# Altium PCB DTMF.PcbDoc
Units mm, origin at the board's own origin, x right, y up, seen from the top; angles counter-clockwise.
Board outline 116.33 x 73.28 mm, 2 copper layers (Top Layer, Bottom Layer); 55 components, 51 nets, 222 pads, 12 vias.
Unrouted connection lines stored in the file: 1.
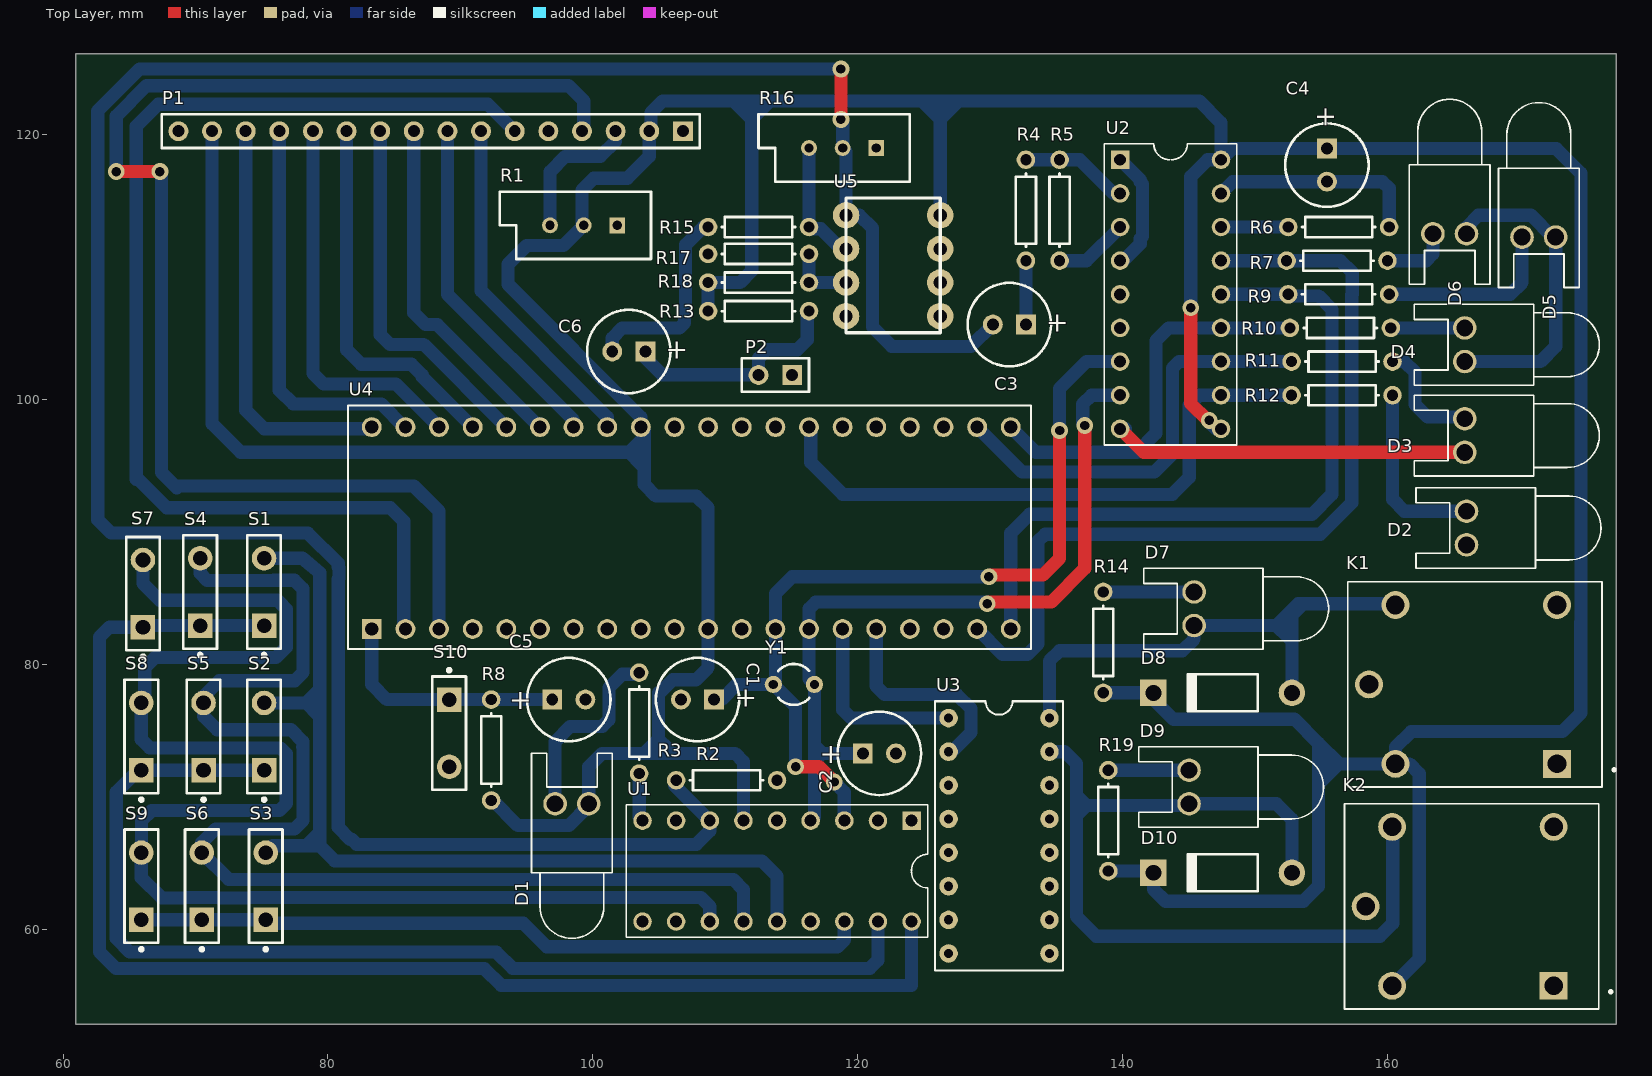
[diagram p0: Top Layer view]
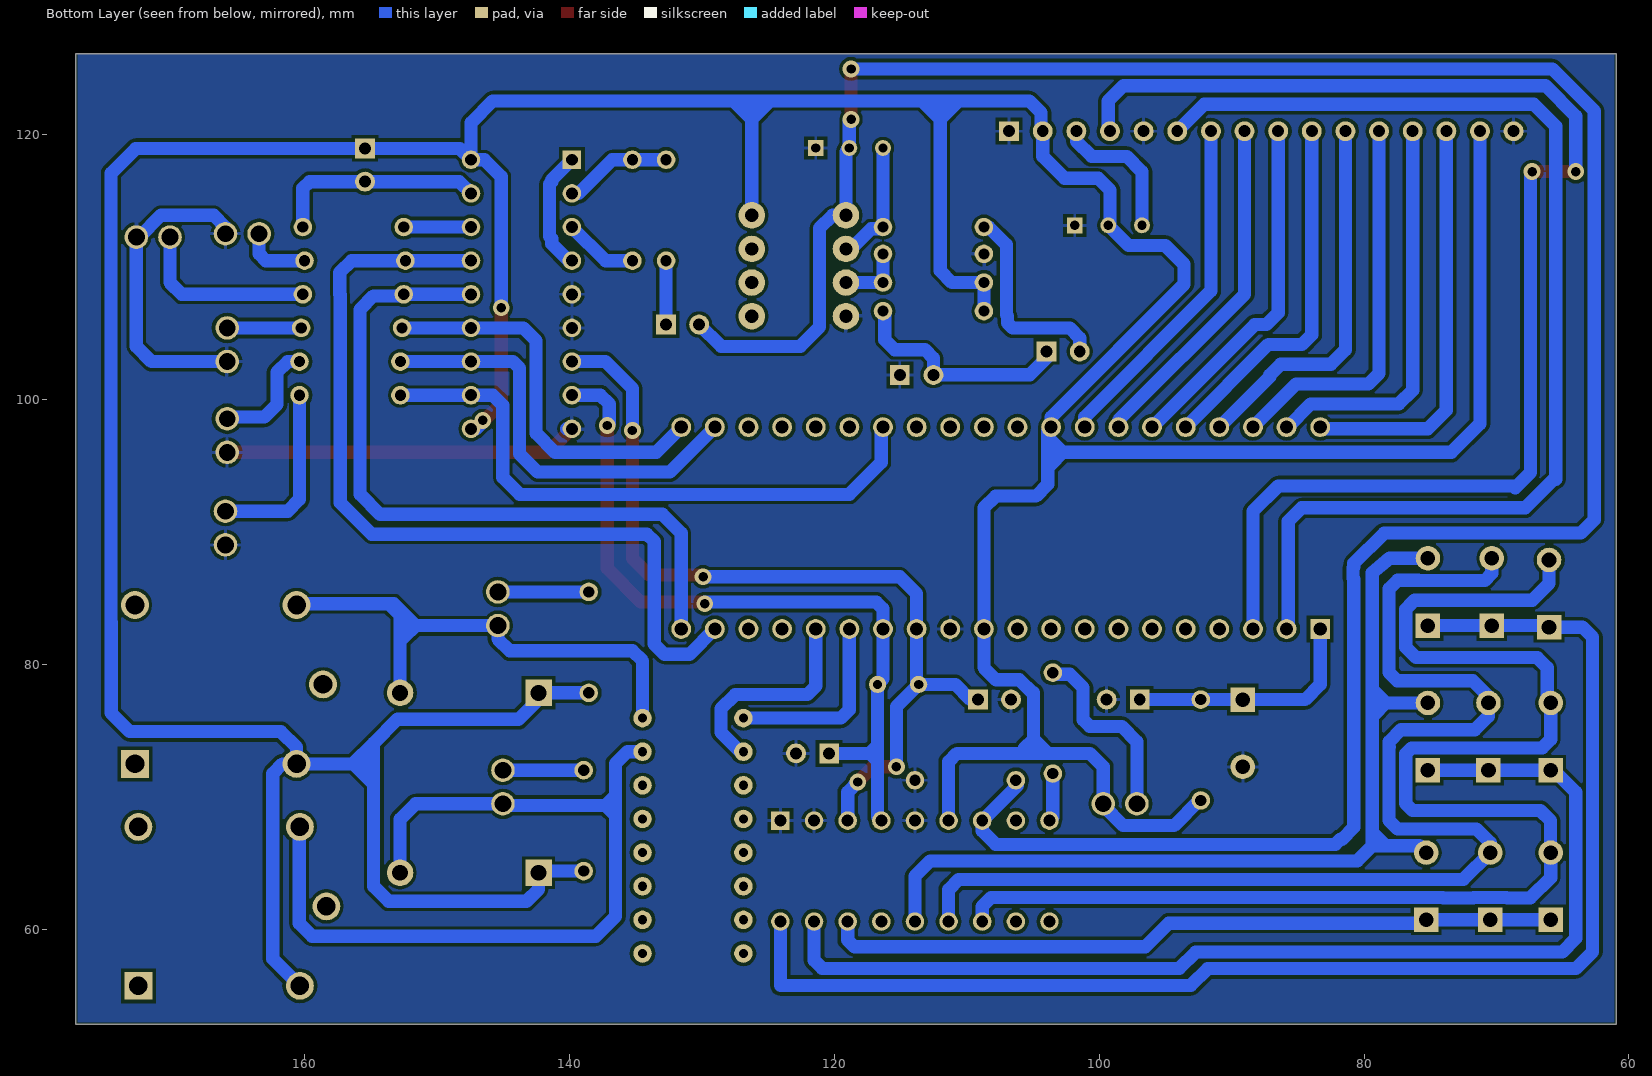
[diagram p1: Bottom Layer view, seen from below]

## Layer stack, top to bottom
Top Solder: solder mask 0.0102, Solder Resist, Dk 3.5
Top Layer: signal copper 0.0356
Dielectric 1: dielectric 0.32, FR-4, Dk 4.8
Bottom Layer: signal copper 0.0356
Bottom Solder: solder mask 0.0102, Solder Resist, Dk 3.5

## Board outline
177.292,126.111 177.292,52.832 60.96,52.832 60.96,126.111

## Design rules (kind name [scope] priority, off if disabled: settings)
Clearance Clearance_1 [All] p1: gap=0.254 ignorepadtopadclearanceinfootprint=FALSE except(0: Arc-Hole Track-Hole SMDPad-Hole THPad-Hole Via-Hole Fill-Hole Poly-Hole Region-Hole Text-Hole)
Clearance [All] p2: gap=0.5 ignorepadtopadclearanceinfootprint=FALSE
PolygonConnect [All] p1: connectstyle=Relief reliefconductorwidth=0.254 reliefentries=4 polygonreliefangle="90 Angle" airgapwidth=0.254
RoutingVias [All] p1: holewidth=0.711 width=1.27 viastyle="Through Hole" minholewidth=0.711 minwidth=1.27 maxholewidth=0.711 maxwidth=1.27
SolderMaskExpansion [All] p1: expansion=0.102
Width [All] p1: maxlimit=2 minlimit=0.5 preferedwidth=1
30 further rules are at their usual default settings.

## Components (designator, comment, footprint, x,y, rotation, side; value= is the part's Value field where it differs from the comment)
C1 "cap" capacitor 109.18,77.343 r180 top value=22pF
C2 "cap" capacitor 120.376,73.279 r0 top value=22pF
C3 "cap" capacitor 132.735,105.664 r180 top value=0.1uF
C4 "cap" capacitor 155.448,118.979 r270 top value=0.1uF
C5 "cap" capacitor 96.921,77.343 r0 top value=0.1uF
C6 "cap" capacitor 103.993,103.632 r180 top value=0.1uF
D1 "LED0" LED-0 98.425,69.469 r0 top
D2 "LED0" LED-0 165.989,90.297 r90 top
D3 "LED0" LED-0 165.862,97.282 r90 top
D4 "LED0" LED-0 165.862,104.14 r90 top
D5 "LED0" LED-0 171.45,112.268 r180 top
D6 "LED0" LED-0 164.719,112.522 r180 top
D7 "LED0" LED-0 145.415,84.201 r90 top
D8 "Diode 1N4007" DO-41 147.574,77.851 r180 top
D9 "LED0" LED-0 145.034,70.739 r90 top
D10 "Diode 1N4007" DO-41 147.574,64.262 r180 top
K1 "1-1721150-0" RELAY_ORWH-SH-105D1F,000 166.624,78.486 r180 top
K2 "1-1721150-0" RELAY_ORWH-SH-105D1F,000 166.37,61.722 r180 top
P1 "Header 16" HDR1X16 106.807,120.269 r180 top
P2 "Header 2" HDR1X2 115.062,101.854 r180 top
R1 "RPot" VR5 99.314,113.157 r180 top value=10K
R2 "Res1" AXIAL-0.3 110.109,71.247 r180 top value=2.2K
R3 "Res1" AXIAL-0.3 103.505,75.565 r90 top value=1K
R4 "Res1" AXIAL-0.3 132.715,114.3 r90 top value=100K
R5 "Res1" AXIAL-0.3 135.255,114.3 r90 top value=100K
R6 "Res1" AXIAL-0.3 156.337,113.03 r0 top value=330
R7 "Res1" AXIAL-0.3 156.21,110.49 r0 top value=4.7K
R8 "Res1" AXIAL-0.3 92.329,73.533 r270 top value=10K
R9 "Res1" AXIAL-0.3 156.337,107.95 r0 top value=4.7K
R10 "Res1" AXIAL-0.3 156.464,105.41 r0 top value=4.7K
R11 "Res1" AXIAL-0.3 156.591,102.87 r0 top value=4.7K
R12 "Res1" AXIAL-0.3 156.591,100.33 r0 top value=4.7K
R13 "Res1" AXIAL-0.3 112.522,106.68 r0 top value=10K
R14 "Res1" AXIAL-0.3 138.557,81.661 r90 top value=1K
R15 "Res1" AXIAL-0.3 112.522,113.03 r180 top value=1K
R16 "RPot" VR5 118.872,118.999 r180 top value=1M
R17 "Res1" AXIAL-0.3 112.522,110.998 r0 top value=10K
R18 "Res1" AXIAL-0.3 112.522,108.839 r0 top value=10K
R19 "Res1" AXIAL-0.3 138.938,68.199 r90 top value=1K
S1 "SW-PB" SPST-2 75.176,85.471 r90 top
S2 "SW-PB" SPST-2 75.176,74.549 r90 top
S3 "SW-PB" SPST-2 75.303,63.246 r90 top
S4 "SW-PB" SPST-2 70.35,85.471 r90 top
S5 "SW-PB" SPST-2 70.604,74.549 r90 top
S6 "SW-PB" SPST-2 70.477,63.246 r90 top
S7 "SW-PB" SPST-2 66.032,85.344 r90 top
S8 "SW-PB" SPST-2 65.905,74.549 r90 top
S9 "SW-PB" SPST-2 65.905,63.246 r90 top
S10 "SW-PB" SPST-2 89.154,74.803 r270 top
U1 "91215" HT9170 113.919,64.389 r180 top
U2 "HT9170" HT9170 143.637,107.95 r270 top
U3 "ULN2004A" ULN2004A 130.683,67.056 r270 top
U4 "PIC16F887A" PIC16F887A 131.572,97.917 r90 top
U5 "LM358" LM358 126.238,115.219 r270 top
Y1 "XTAL" R38 115.189,78.486 r270 top

## Footprints (in the part's own frame and the unit in brackets; to place one, negate y for a bottom-side part, rotate by r counter-clockwise, add the part's x,y. Pads: shape width x height; smd on the part's side, far side on the other; paste and mask are expansions set on the pad)
AXIAL-0.3 [mm] "Axial Device, Thru-Hole; 2 Leads; 0.3 in Pin Spacing"
  round 1.4 hole 0.85: 1(-3.81,0) 2(3.81,0)
  silkscreen extent -2.77,-0.76 2.77,0.76
capacitor [mm]
  rect 1.5x1.5 hole 0.9: 1(0.02,0)
  round 1.5 hole 0.9: 2(2.52,0)
  silkscreen extent -1.88,-3.15 4.42,3.15
DO-41 [mm] "Diode, Axial; Body 5.2 x 2.7 mm (LxDia. max), Lead Dia. 0.86 mm (max)"
  round 2 hole 1.2: 1(-5.23,0)
  rect 2x2 hole 1.2: 2(5.23,0)
  silkscreen extent -2.65,-1.4 2.75,1.4
HDR1X2 [mm] "Connector; Header; 2 Position"
  rect 1.5x1.5 hole 0.9: 1(0,0)
  round 1.5 hole 0.9: 2(2.54,0)
  silkscreen extent -1.27,-1.27 3.81,1.27
HDR1X16 [mm] "Connector; Header; 16 Position"
  rect 1.5x1.5 hole 0.9: 1(0,0)
  round 1.5 hole 0.9: 2(2.54,0) 3(5.08,0) 4(7.62,0) 5(10.16,0) 6(12.7,0) 7(15.24,0) 8(17.78,0) 9(20.32,0) 10(22.86,0) 11(25.4,0) 12(27.94,0) 13(30.48,0) 14(33.02,0) 15(35.56,0) 16(38.1,0)
  silkscreen extent -1.27,-1.27 39.37,1.27
HT9170 [mm]
  rect 1.4x1.4 hole 0.9: 1(-10.16,-3.81)
  round 1.4 hole 0.9: 2(-7.62,-3.81) 3(-5.08,-3.81) 4(-2.54,-3.81) 5(0,-3.81) 6(2.54,-3.81) 7(5.08,-3.81) 8(7.62,-3.81) 9(10.16,-3.81) 10(10.16,3.81) 11(7.62,3.81) 12(5.08,3.81) 13(2.54,3.81) 14(0,3.81) 15(-2.54,3.81) 16(-5.08,3.81) 17(-7.62,3.81) 18(-10.16,3.81)
  silkscreen extent -11.38,-5 11.38,5
LED-0 [mil] "LED; 2 Leads"
  round 70 hole 50: 1(50,0) 2(-50,0)
  silkscreen extent -120,-400 120,150
LM358 [mm] "LM358"
  round 2 hole 1: 1(1.3,-7.11) 2(3.84,-7.11) 3(6.38,-7.11) 4(8.92,-7.11) 5(8.92,0) 6(6.38,0) 7(3.84,0) 8(1.3,0)
  silkscreen extent 0,-7.11 10.16,0
PIC16F887A [mil]
  rect 59x59 hole 39: 1(-600,1900)
  round 59 hole 39: 2(-600,1800) 3(-600,1700) 4(-600,1600) 5(-600,1500) 6(-600,1400) 7(-600,1300) 8(-600,1200) 9(-600,1100) 10(-600,1000) 11(-600,900) 12(-600,800) 13(-600,700) 14(-600,600) 15(-600,500) 16(-600,400) 17(-600,300) 18(-600,200) 19(-600,100) 20(-600,0) 21(0,0) 22(0,100) 23(0,200) 24(0,300) 25(0,400) 26(0,500) 27(0,600) 28(0,700) 29(0,800) 30(0,900) 31(0,1000) 32(0,1100) 33(0,1200) 34(0,1300) 35(0,1400) 36(0,1500) 37(0,1600) 38(0,1700) 39(0,1800) 40(0,1900)
  silkscreen extent -660,-60 65,1971
R38 [mm] "Crystal, Thru-Hole; 2 Leads; Body 3.1 x 8.2 mm (Dia.xH)"
  round 1.3 hole 0.7: 1(0,1.55) 2(0,-1.55)
  silkscreen extent -1.55,-1.19 1.55,1.17
RELAY_ORWH-SH-105D1F,000 [mm]
  rect 2.1x2.1 hole 1.4: 1(-6.2,6)
  round 2.1 hole 1.4: 2(-6.2,-6) 3(6,6) 4(8,0) 5(6,-6)
  silkscreen extent -10.61,-7.75 9.6,7.75
SPST-2 [mm] "Switch; 2 Leads"
  rect 1.85x1.85 hole 1.1: 1(-2.54,0)
  round 1.85 hole 1.1: 2(2.54,0)
  silkscreen extent -4.89,-1.27 4.28,1.27
ULN2004A [mm]
  round 1.4 hole 0.7: 1(-8.89,-3.81) 2(-6.35,-3.81) 3(-3.81,-3.81) 4(-1.27,-3.81) 5(1.27,-3.81) 6(3.81,-3.81) 7(6.35,-3.81) 8(8.89,-3.81) 9(8.89,3.81) 10(6.35,3.81) 11(3.81,3.81) 12(1.27,3.81) 13(-1.27,3.81) 14(-3.81,3.81) 15(-6.35,3.81) 16(-8.89,3.81)
  silkscreen extent -10.16,-4.83 10.16,4.83
VR5 [mm] "Thru-Hole; 3 Leads"
  rect 1.2x1.2 hole 0.7: 1(-2.54,0)
  round 1.2 hole 0.7: 2(0,0) 3(2.54,0)
  silkscreen extent -5.08,-2.54 6.35,2.54

## Part data
D1 D2 D3 D4 D5 D6 D7 D9: "Typical INFRARED GaAs LED", LatestRevisionDate=08-Jul-2005, LatestRevisionNote="Mech Layer 1 removed.", PackageDescription="LED; 2 Leads", PackageReference=LED-0, Published=8-Jun-2000, Publisher="Altium Limited"
D8 D10: "1 Amp General Purpose Rectifier", Code_JEDEC=DO-204-AL, ComponentLink1Description="Manufacturer Link", ComponentLink1URL=http://www.fairchildsemi.com/, ComponentLink2Description=Datasheet, ComponentLink2URL=http://www.fairchildsemi.com/ds/1N%2F1N4001.pdf, DatasheetVersion=1998, LatestRevisionDate=17-Jul-2002, LatestRevisionNote="Re-released for DXP Platform.", PackageDescription="Diode, Axial; Body 5.2 x 2.7 mm (LxDia. max), Lead Dia. 0.86 mm (max)", PackageReference=DO-41, PackageVersion=Aug-1999, Published=8-Jun-2000, Publisher="Altium Limited"
K1 K2: library part ORWH-SH-105D1F,000, "Electromechanical Relay 5VDC 15A SPDT __ 19.2mm 15.5mm 15mm__ THT General Purpose Relay", Package=None, Availability=Unavailable, MF="TE Connectivity", MP=ORWH-SH-105D1F,000, Price=None, SnapEDA_Link=https://www.snapeda.com/parts/ORWH-SH-105D1F%2C000/TE%20Connectivity%20Potter%20%26%20Brumfield%20Relays/view-part/573992/?ref=snap, TE_purchase_URL=https://www.te.com/usa-en/product-1-1721150-0.html?te_bu=Cor&te_type=disp&te_campaign=seda_glo_cor-seda-global-disp-prtnr-fy19-seda-model-bom-cta_sma-317_1&elqCampaignId=32493
P1: "Header, 16-Pin", LatestRevisionDate=17-Jul-2002, LatestRevisionNote="Re-released for DXP Platform.", Publisher="Altium Limited"
P2: "Header, 2-Pin", LatestRevisionDate=17-Jul-2002, LatestRevisionNote="Re-released for DXP Platform.", Publisher="Altium Limited"
R1 R16: "Potentiometer", LatestRevisionDate=17-Jul-2002, LatestRevisionNote="Re-released for DXP Platform.", PackageDescription="Variable Resistor, Thru-Hole; 3 Leads", PackageReference=VR5, Published=8-Jun-2000, Publisher="Altium Limited", Set Position=0.5, Sim Note="Enter the Resistance value and the set point into parameter fields."
R2 R3 R4 R5 R6 R7 R8 R9 R10 R11 R12 R13 R14 R15 R17 R18 R19: "Resistor", LatestRevisionDate=17-Jul-2002, LatestRevisionNote="Re-released for DXP Platform.", PackageDescription="Axial Device, Thru-Hole; 2 Leads; 0.3 in Pin Spacing", PackageReference=AXIAL-0.3, Published=8-Jun-2000, Publisher="Altium Limited"
S1 S2 S3 S4 S5 S6 S7 S8 S9 S10: "Switch", LatestRevisionDate=17-Jul-2002, LatestRevisionNote="Re-released for DXP Platform.", PackageDescription="Switch; 2 Leads", PackageReference=SPST-2, Published=24-Mar-1999, Publisher="Altium Limited"
U2: Package=None, Availability=Unavailable, MF=Holtek, MP=HT9170B, Price=None, SnapEDA_Link=https://www.snapeda.com/parts/HT9170B/Holtek/view-part/105806/?ref=snap
U3: Package="DIP-16 STMicroelectronics", Availability=Unavailable, DigiKey-Purchase-URL=https://snapeda.com/shop?store=DigiKey&id=45236, MF=STMicroelectronics, MP=ULN2004A, Price=None, SnapEDA_Link=https://www.snapeda.com/parts/ULN2004A/STMicroelectronics/view-part/45236/?ref=snap
U4: library part PIC16F877A-I/P, "PIC PIC® 16F Microcontroller IC 8-Bit 20MHz 14KB _8K x 14_ FLASH 40-PDIP", Package="DIP-40 Microchip", Availability=Unavailable, MF=Microchip, MP=PIC16F877A-I/P, Price=None, SnapEDA_Link=https://www.snapeda.com/parts/PIC16F877A-I/P/Microchip/view-part/1877145/?ref=snap
Y1: "Crystal Oscillator", LatestRevisionDate=17-Jul-2002, LatestRevisionNote="Re-released for DXP Platform.", PackageDescription="Crystal, Thru-Hole; 2 Leads; Body 3.1 x 8.2 mm (Dia.xH)", PackageReference=R38, Published=8-Jun-2000, Publisher="Altium Limited"

## Via types
v1: diameter 1.27, hole 0.711, Top Layer to Bottom Layer, 12 vias

## Nets (pads, with @x,y where several pads share a name; then routed paths per layer and width w, separated by ;. In a path a pad name is that pad's centre, name@x,y a point inside that pad or via, vN(x,y) a via of type N, cw(c..) or ccw(c..) an arc to the next point about the centre after c; other vN are vias at no path point)
+5: C4.1 D1.1 D8.2 D10.2 K1.3 K2.3 P1.2 P1.15 R1.2 R8.2 R13.1 R14.1 R18.1 R19.1 U1.6 U2.10 U2.18 U4.11 U4.32 U5.8 | length 422.8
  Top Layer w1: v1(145.161,106.934) 145.161,99.695 146.431,98.425 v1(146.558,98.425)
  Bottom Layer w1: P1.15 71.247,98.171 73.406,96.012 102.743,96.012 ; R8.2 92.456,69.723 94.353,67.826 98.179,67.826 99.695,69.342 D1.1 99.695,72.263 100.711,73.279 103.886,73.279 ; 104.959,73.984 104.959,74.352 ; R13.1 R18.1 111.125,108.839 112.014,109.728 112.014,121.158 ; U1.6 111.379,72.644 110.744,73.279 105.664,73.279 ; U5.8 126.238,121.158 ; R14.1 D8.2 142.344,77.366 143.859,75.851 153.003,75.851 154.804,74.05 ; R19.1 142.217,64.389 D10.2 142.344,63.015 143.256,62.103 153.67,62.103 154.804,63.237 154.804,71.12 ; v1(145.161,106.934) 145.161,116.84 146.431,118.11 U2.18 ; v1(146.558,98.425) 146.558,98.298 147.066,97.79 U2.10 ; K2.3 162.42,57.772 162.42,71.755 161.689,72.486 K1.3 ; K1.3@160.624,72.421 K1.3 ; 102.743,96.012 103.632,95.123 103.886,95.123 ; 102.743,96.012 103.759,96.012 103.886,95.885 ; 102.743,96.012 103.886,97.155 ; 103.886,73.279 104.959,74.352 ; 103.886,73.279 105.664,73.279 ; 103.886,95.123 103.886,95.885 ; 103.886,95.123 103.886,93.599 104.775,92.71 107.823,92.71 108.712,91.821 U4.11 108.712,79.756 107.803,78.847 106.037,78.847 105.041,77.851 104.959,77.851 104.959,74.352 ; 103.886,95.885 103.886,97.155 ; 103.886,97.155 103.886,97.663 U4.32 103.632,98.679 93.599,108.712 93.599,110.236 94.996,111.633 97.79,111.633 R1.2 99.187,113.284 99.187,115.824 100.076,116.713 102.616,116.713 104.267,118.364 P1.2 104.394,120.396 104.394,121.666 105.283,122.555 110.871,122.555 ; 104.959,74.352 105.664,73.647 105.664,73.279 ; 110.871,122.555 110.871,122.301 112.014,121.158 ; 110.871,122.555 112.014,122.555 ; 112.014,121.158 113.411,122.555 ; 112.014,121.158 112.014,122.555 ; 112.014,122.555 113.411,122.555 ; 113.411,122.555 124.841,122.555 ; 124.841,122.555 126.238,121.158 ; 124.841,122.555 126.238,122.555 ; 126.238,121.158 126.619,121.539 ; 126.238,122.555 126.238,121.92 126.619,121.539 ; 126.238,122.555 127.635,122.555 ; 126.619,121.539 127.635,122.555 ; 127.635,122.555 145.796,122.555 147.447,120.904 U2.18 ; U2.18 148.296,118.959 C4.1 172.76,118.959 174.628,117.091 174.628,83.182 174.625,83.185 174.625,76.327 173.228,74.93 161.798,74.93 160.624,73.756 K1.3 ; 154.804,71.12 154.971,71.12 156.337,72.486 ; 154.804,71.12 154.804,72.898 ; 154.804,72.898 155.216,72.486 156.337,72.486 ; 154.804,72.898 154.804,74.05 ; 154.804,74.05 156.337,72.517 156.337,72.486 ; 156.337,72.486 K1.3
con: C3.2 R2.2 R16.2 U1.7 U5.1 | length 193.4
  Top Layer w1: v1(118.745,121.158) v1(118.745,124.968)
  Bottom Layer w1: R2.2@106.172,71.374 106.172,70.866 U1.7 108.839,67.421 107.823,66.405 82.185,66.405 81.788,66.802 81.661,66.802 80.772,67.691 80.772,86.433 80.833,86.494 80.833,87.303 80.772,87.365 80.772,87.63 78.486,89.916 63.627,89.916 62.619,90.924 62.619,121.796 65.791,124.968 v1(118.745,124.968) ; v1(118.745,121.158) 118.872,121.031 R16.2 119.128,118.743 U5.1 120.142,113.919 121.128,112.933 121.128,105.471 122.586,104.013 128.564,104.013 C3.2 C3.2@130.175,105.704
GND: C1.2 C2.2 C5.2 D2.2 D3.2 D4.2 D5.2 D6.2 P1.1 P1.5 P1.16 P2.1 R1.1 R2.1 R16.1 R17.1 S10.2 U1.1 U1.2 U1.5 U2.5 U2.6 U2.9 U4.12 U5.4 | length 51
  Top Layer w1: U2.9 141.605,96.012 D3.2
  Bottom Layer w1: U2.9 U2.9@140.208,97.79 ; D4.2 171.577,102.87 172.72,104.013 D5.2 172.504,112.268 170.861,113.911 166.87,113.911 165.989,113.03 D6.2
Lcd4: P1.4 U4.3 | length 100.5
  Top Layer w1: v1(64.008,117.221) v1(67.31,117.221)
  Bottom Layer w1: v1(64.008,117.221) 64.008,121.412 66.294,123.698 98.171,123.698 99.314,122.555 99.314,120.396 P1.4 ; v1(67.31,117.221) 67.437,117.094 67.437,94.488 68.58,93.345 68.707,93.472 86.487,93.472 88.392,91.567 U4.3
Lcd6: P1.6 U4.2 | length 86.5
  Bottom Layer w1: U4.2 85.725,82.804 85.725,84.455 85.725,90.805 84.709,91.821 67.818,91.821 65.659,93.98 65.532,93.98 65.532,120.65 67.183,122.301 90.424,122.301 92.075,122.301 P1.6
Lcd7: P1.7 U4.33 | length 26.3
  Bottom Layer w1: P1.7 91.567,108.204 101.092,98.679 U4.33
Lcd8: P1.8 U4.34 | length 26.3
  Bottom Layer w1: P1.8 89.027,107.95 98.552,98.425 U4.34
Lcd9: P1.9 U4.35 | length 27.1
  Bottom Layer w1: P1.9 86.487,106.553 87.374,105.666 88.263,105.666 U4.35 U4.35@96.012,98.171
Lcd10: P1.10 U4.36 | length 27.8
  Bottom Layer w1: P1.10 83.947,104.902 84.683,104.166 87.223,104.166 U4.36
Lcd11: P1.11 U4.37 | length 28.5
  Bottom Layer w1: P1.11 81.407,103.759 82.5,102.666 86.31,102.666 87.122,101.854 87.122,101.727 U4.37
Lcd12: P1.12 U4.38 | length 29.5
  Bottom Layer w1: P1.12 78.867,101.981 79.682,101.166 85.143,101.166 U4.38
Lcd13: P1.13 U4.39 | length 30.2
  Bottom Layer w1: P1.13 76.327,100.711 77.372,99.666 84.037,99.666 U4.39@85.819,97.884
Lcd14: P1.14 U4.40 | length 31.2
  Bottom Layer w1: P1.14 73.787,99.187 75.184,97.79 83.185,97.79 U4.40
mic: C6.1 P2.2 R13.2 | length 17.3
  Bottom Layer w1: C6.1 103.973,103.164 105.255,101.882 112.494,101.882 P2.2 112.522,103.124 113.157,103.759 115.443,103.759 116.205,104.521 116.205,106.553 R13.2
NetC3_1: C3.1 R4.1 | length 4.8
  Bottom Layer w1: C3.1 R4.1
NetC4_2: C4.2 R6.2 U2.17 | length 16.2
  Bottom Layer w1: U2.17 148.336,116.459 C4.2 159.639,116.459 160.147,115.951 R6.2
NetC6_2: C6.2 R15.2 | length 15.1
  Bottom Layer w1: C6.2 101.473,104.648 102.235,105.41 106.553,105.41 106.934,105.791 106.934,106.299 107.012,106.377 107.012,111.702 108.34,113.03 R15.2
NetD1_2: D1.2 R3.2 | length 14.6
  Bottom Layer w1: D1.2 97.155,74.168 98.298,75.311 100.711,75.311 101.219,75.819 101.219,78.232 102.235,79.248 103.378,79.248 R3.2
NetD2_1: D2.1 R12.2 | length 13.8
  Bottom Layer w1: R12.2 160.401,92.456 161.29,91.567 D2.1
NetD3_1: D3.1 R11.2 | length 8.9
  Bottom Layer w1: R11.2 161.29,102.87 162.101,102.059 162.101,99.626 163.048,98.679 D3.1@166.116,98.679
NetD4_1: D4.1 R10.2 | length 5.5
  Bottom Layer w1: R10.2 D4.1@165.735,105.41
NetD5_1: D5.1 R9.2 | length 13.8
  Bottom Layer w1: R9.2 169.291,107.95 170.18,108.839 D5.1
NetD6_1: D6.1 R7.2 | length 5.2
  Bottom Layer w1: R7.2 162.941,110.49 163.449,110.998 D6.1
NetD7_1: D7.1 R14.2 | length 6.9
  Bottom Layer w1: R14.2 D7.1
NetD7_2: D7.2 D8.1 K1.5 U3.16 | length 42.7
  Bottom Layer w1: U3.16 134.493,80.264 135.255,81.026 144.526,81.026 145.415,81.915 D7.2 151.638,82.931 ; D8.1 152.804,82.042 ; K1.5 160.528,84.582 153.67,84.582 ; 151.638,82.931 152.527,82.042 152.804,82.042 ; 151.638,82.931 152.804,82.931 ; 151.638,82.931 153.289,84.582 153.67,84.582 ; 152.804,82.042 152.804,82.931 ; 152.804,82.931 152.804,83.716 153.67,84.582
NetD9_1: D9.1 R19.2 | length 6.1
  Bottom Layer w1: R19.2 D9.1
NetD9_2: D9.2 D10.1 K2.5 U3.15 | length 68.4
  Bottom Layer w1: U3.15 135.636,73.406 136.525,72.517 136.525,70.104 ; D9.2@145.034,69.342 137.287,69.342 ; D9.2 151.638,69.469 152.804,68.303 D10.1 ; K2.5 160.42,67.672 160.42,60.433 159.454,59.467 138.018,59.467 136.525,60.96 136.525,68.58 ; 136.525,68.58 137.287,69.342 ; 136.525,68.58 136.525,70.104 ; 136.525,70.104 137.287,69.342
NetP1_3: P1.3 R1.3 | length 10.7
  Bottom Layer w1: R1.3 96.774,117.221 97.917,118.364 100.584,118.364 101.727,119.507 P1.3
NetR3_1: R3.1 U1.9 | length 3.7
  Bottom Layer w1: R3.1 103.505,68.453 U1.9
NetR4_2: R4.2 R5.2 U2.2 | length 8.2
  Bottom Layer w1: R4.2 R5.2 136.779,118.11 139.319,115.57 U2.2
NetR5_1: R5.1 U2.3 | length 5.6
  Bottom Layer w1: R5.1 137.287,110.49 U2.3
NetR6_1: R6.1 U2.16 | length 5.1
  Bottom Layer w1: U2.16 R6.1
NetR15_1: R15.1 R16.3 U5.2 | length 9.4
  Bottom Layer w1: R16.3 R15.1 116.459,112.903 117.221,112.903 118.745,111.379 U5.2
NetR17_2: R17.2 R18.2 U5.3 | length 5
  Bottom Layer w1: R17.2 R18.2 U5.3
NetS1_1: S1.1 S4.1 S7.1 U1.18 | length 103.9
  Bottom Layer w1: 74.168,82.931 74.041,82.931 ; S1.1 74.041,82.931 ; U1.18 124.079,55.753 93.091,55.753 91.821,57.023 64.008,57.023 62.738,58.293 62.738,82.042 63.5,82.804 S7.1 66.159,82.931 S4.1 74.041,82.931
NetS1_2: S1.2 S2.2 S3.2 U1.14 | length 77.1
  Bottom Layer w1: S2.2 78.359,77.089 ; S1.2 78.086,88.011 79.375,86.929 79.375,78.105 ; S3.2 75.811,66.294 78.359,66.294 ; 79.375,67.437 79.375,67.31 ; U1.14 113.919,64.008 112.776,65.151 80.518,65.151 79.375,66.294 ; 78.359,66.294 79.375,66.294 ; 78.359,66.294 79.375,67.31 ; 78.359,77.089 79.248,76.2 79.375,76.2 ; 78.359,77.089 79.248,77.089 79.375,77.216 ; 78.359,77.089 79.375,78.105 ; 79.375,66.294 79.375,67.31 ; 79.375,67.31 79.375,76.2 ; 79.375,76.2 79.375,77.216 ; 79.375,77.216 79.375,78.105
NetS2_1: S2.1 S5.1 S8.1 U1.17 | length 84.5
  Bottom Layer w1: S2.1 S5.1 S8.1 65.659,72.009 64.008,70.358 64.008,59.309 65.04,58.277 92.726,58.277 93.964,57.039 120.92,57.039 121.539,57.658 U1.17
NetS3_1: S3.1 S6.1 S9.1 U1.16 | length 54.8
  Bottom Layer w1: S9.1 S6.1 S3.1 ; S3.1@75.938,60.452 94.742,60.452 96.52,58.674 118.491,58.674 118.999,59.182 U1.16
NetS4_2: S4.2 S5.2 S6.2 U1.13 | length 94.5
  Bottom Layer w1: S4.2@70.223,88.392 S4.2@70.308,88.053 ; S5.2@70.35,77.343 S5.2 ; S6.2@70.604,65.913 S6.2 ; S5.2@70.612,77.097 S5.2 ; 78.105,73.77 78.109,73.766 ; U1.13 111.379,62.992 110.617,63.754 72.509,63.754 S6.2 ; S4.2@70.308,88.053 S4.2@70.318,88.011 ; S4.2@70.308,88.053 S4.2 ; S4.2@70.318,88.011 70.32,88.004 S4.2@70.35,87.884 ; S4.2@70.318,88.011 S4.2 ; S4.2@70.35,87.884 70.35,86.876 70.894,86.332 75.871,86.332 75.899,86.36 77.47,86.36 78.109,85.721 78.109,79.379 77.498,78.768 71.783,78.768 70.604,77.589 S5.2 ; S4.2@70.35,87.884 S4.2 ; S6.2 70.477,66.54 71.501,67.564 77.47,67.564 78.109,68.203 78.109,73.766 ; S5.2 70.604,76.081 71.628,75.057 77.216,75.057 78.109,74.164 78.109,73.766
NetS7_2: S7.2 S8.2 S9.2 U1.12 | length 109.8
  Bottom Layer w1: S7.2@65.905,88.011 S7.2 ; S7.2@66.294,88.146 S7.2 ; U1.12@108.712,60.579 U1.12 108.839,61.722 108.176,62.385 74.066,62.385 74.038,62.357 71.742,62.357 71.714,62.385 69.24,62.385 69.212,62.357 67.437,62.357 65.905,63.889 S9.2 65.913,65.794 65.913,68.199 66.675,68.961 76.327,68.961 76.851,69.485 76.851,70.768 76.855,70.772 76.855,73.246 76.413,73.688 66.548,73.688 65.905,74.331 S8.2 66.167,77.351 66.167,79.756 66.929,80.518 76.073,80.518 76.855,81.3 76.855,84.168 76.518,84.505 76.518,84.534 76.2,84.852 75.962,84.852 75.946,84.836 72.39,84.836 72.374,84.852 67.294,84.852 66.032,86.114 S7.2
NetU2_1: U2.1 U2.4 | length 9.2
  Bottom Layer w1: U2.4 140.081,110.49 141.351,111.76 141.351,112.15 141.527,112.326 141.527,114.866 141.527,116.274 141.351,116.45 141.351,116.586 U2.1
NetU3_1: U3.1 U4.15 | length 14.4
  Bottom Layer w1: U4.15 118.872,76.581 119.507,75.946 U3.1
NetU3_2: U3.2 U4.16 | length 16.3
  Bottom Layer w1: U4.16 121.412,78.359 122.047,77.724 127.499,77.724 128.573,76.65 128.573,74.881 127.098,73.406 U3.2
r1: R7.1 U2.15 U4.19 | length 66
  Bottom Layer w1: U4.19 130.937,80.772 132.842,80.772 133.604,81.534 133.604,89.281 134.16,89.837 154.95,89.837 157.329,92.216 157.329,107.926 157.353,107.95 157.353,109.601 156.464,110.49 R7.1 U2.15
r2: R9.1 U2.14 U4.20 | length 55.5
  Bottom Layer w1: U4.20 131.572,89.916 132.993,91.337 154.329,91.337 155.829,92.837 155.829,98.23 155.829,106.807 154.813,107.823 152.654,107.823 R9.1 U2.14
r3: R10.1 U2.13 U4.21 | length 29.8
  Bottom Layer w1: U4.21 133.461,96.028 141.113,96.028 142.535,97.45 142.535,104.435 143.51,105.41 U2.13 R10.1
r4: R11.1 U2.12 U4.22 | length 32.4
  Bottom Layer w1: U4.22 132.421,94.528 142.407,94.528 143.789,95.91 143.789,102.387 144.272,102.87 U2.12 R11.1
r5: R12.1 U2.11 U4.27 | length 46.3
  Bottom Layer w1: U4.27 116.459,97.79 116.459,95.25 118.872,92.837 143.764,92.837 145.043,94.116 145.043,99.577 145.796,100.33 U2.11 R12.1
Reset: C5.1 R8.1 S10.1 U4.1 | length 18.5
  Bottom Layer w1: U4.1@83.185,82.55 U4.1 83.312,78.486 84.455,77.343 S10.1 R8.1 C5.1
x1: C1.1 U1.3 U2.7 U4.13 Y1.2 | length 66.3
  Top Layer w1: v1(115.316,72.263) 117.094,72.263 v1(118.237,71.12) ; v1@130.048,86.614 v1(129.921,86.614) 130.048,86.741 133.985,86.741 135.255,88.011 v1(135.255,97.663)
  Bottom Layer w1: C1.1@109.18,77.343 109.728,77.343 110.871,78.486 Y1.2 ; v1(115.316,72.263) 115.316,76.809 Y1.2 ; v1(118.237,71.12) 118.999,70.358 U1.3 ; v1(129.921,86.614) 115.062,86.614 113.792,85.344 U4.13 113.792,78.639 Y1.2 ; v1(135.255,97.663) 135.255,100.838 137.287,102.87 U2.7
x2: C2.1 U1.4 U2.8 U4.14 Y1.1 | length 59.3
  Top Layer w1: v1(129.794,84.582) 129.921,84.709 134.62,84.709 137.16,87.249 v1(137.16,98.044)
  Bottom Layer w1: U4.14@116.078,82.677 U4.14 ; U1.4 116.739,68.479 116.739,72.67 ; C2.1@120.523,73.152 C2.1 117.348,73.279 ; v1(129.794,84.582) 129.794,84.709 116.84,84.709 116.332,84.201 U4.14 ; v1(137.16,98.044) 137.009,98.195 137.009,99.671 137.668,100.33 U2.8 ; U4.14 116.332,78.893 Y1.1 116.739,73.888 ; 116.739,72.67 116.739,73.888 ; 116.739,72.67 117.348,73.279 ; 116.739,73.888 117.348,73.279
pads on no net: K1.1 K1.2 K1.4 K2.1 K2.2 K2.4 U1.8 U1.10 U1.11 U1.15 U3.3 U3.4 U3.5 U3.6 U3.7 U3.8 U3.9 U3.10 U3.11 U3.12 U3.13 U3.14 U4.4 U4.5 U4.6 U4.7 U4.8 U4.9 U4.10 U4.17 U4.18 U4.23 U4.24 U4.25 U4.26 U4.28 U4.29 U4.30 U4.31 U5.5 U5.6 U5.7

## Polygon pours and split planes (outlines as drawn)
GND on Bottom Layer "Bottom Layer-No Net" (solid, pour order 4): 61.087,126.111 61.087,52.959 177.165,52.959 177.165,126.111

## Silkscreen, mask and mechanical layers (free items; w line width, h text height)
Mechanical 1:
  lines w0.254: 61.087,52.959 177.165,52.959 177.165,126.111 61.087,126.111 61.087,53.086 61.087,52.959

## Text inside footprints (layer, text, board x,y; h text height)
C1: Top Overlay "+" at 112.408,78.093 h1.5 r180
C2: Top Overlay "+" at 117.148,72.529 h1.5
C3: Top Overlay "+" at 135.963,106.414 h1.5 r180
C4: Top Overlay "+" at 154.698,122.207 h1.5 r270
C5: Top Overlay "+" at 93.693,76.593 h1.5
C6: Top Overlay "+" at 107.221,104.382 h1.5 r180